# EAGLE board jr-support (EAGLE 8.1.0)
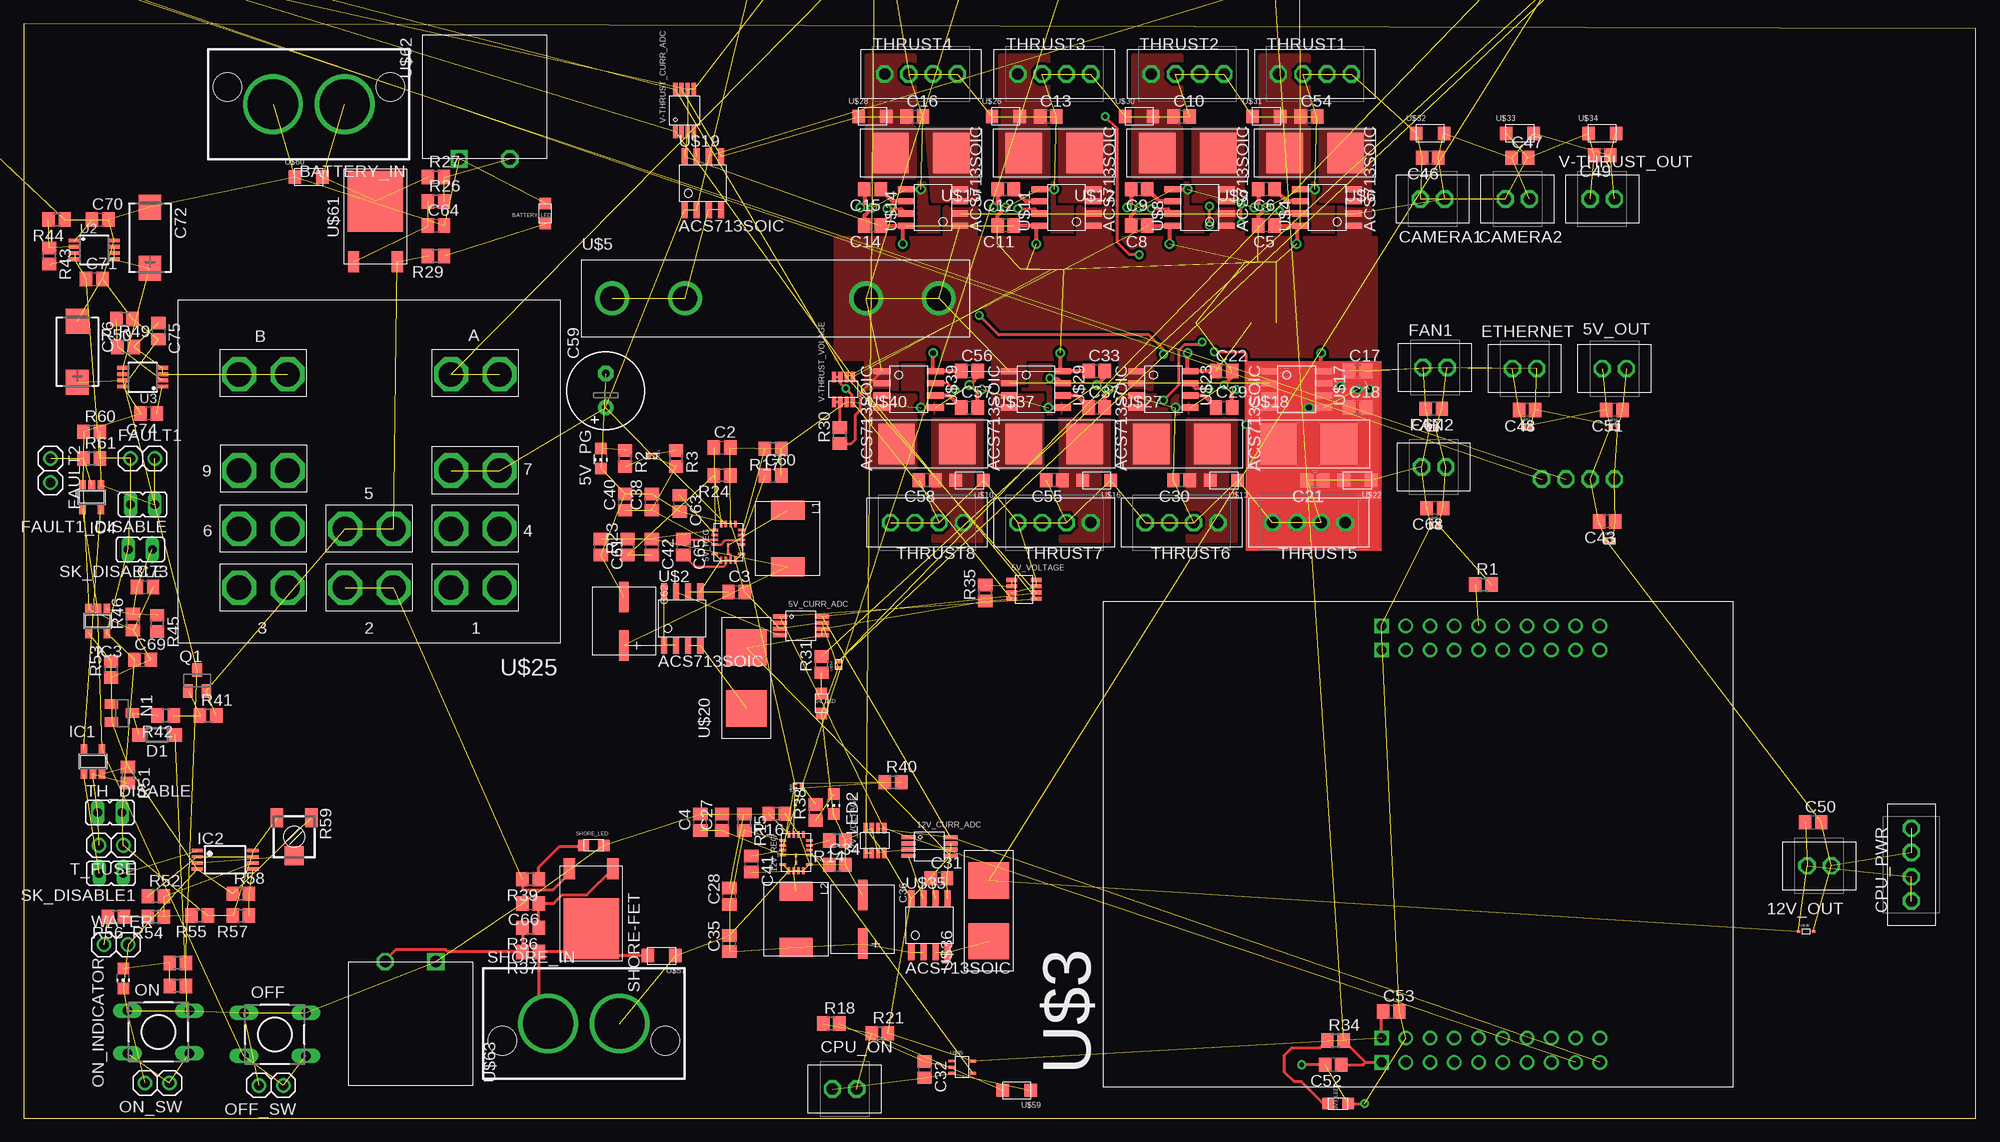
[diagram p0: board, top side]
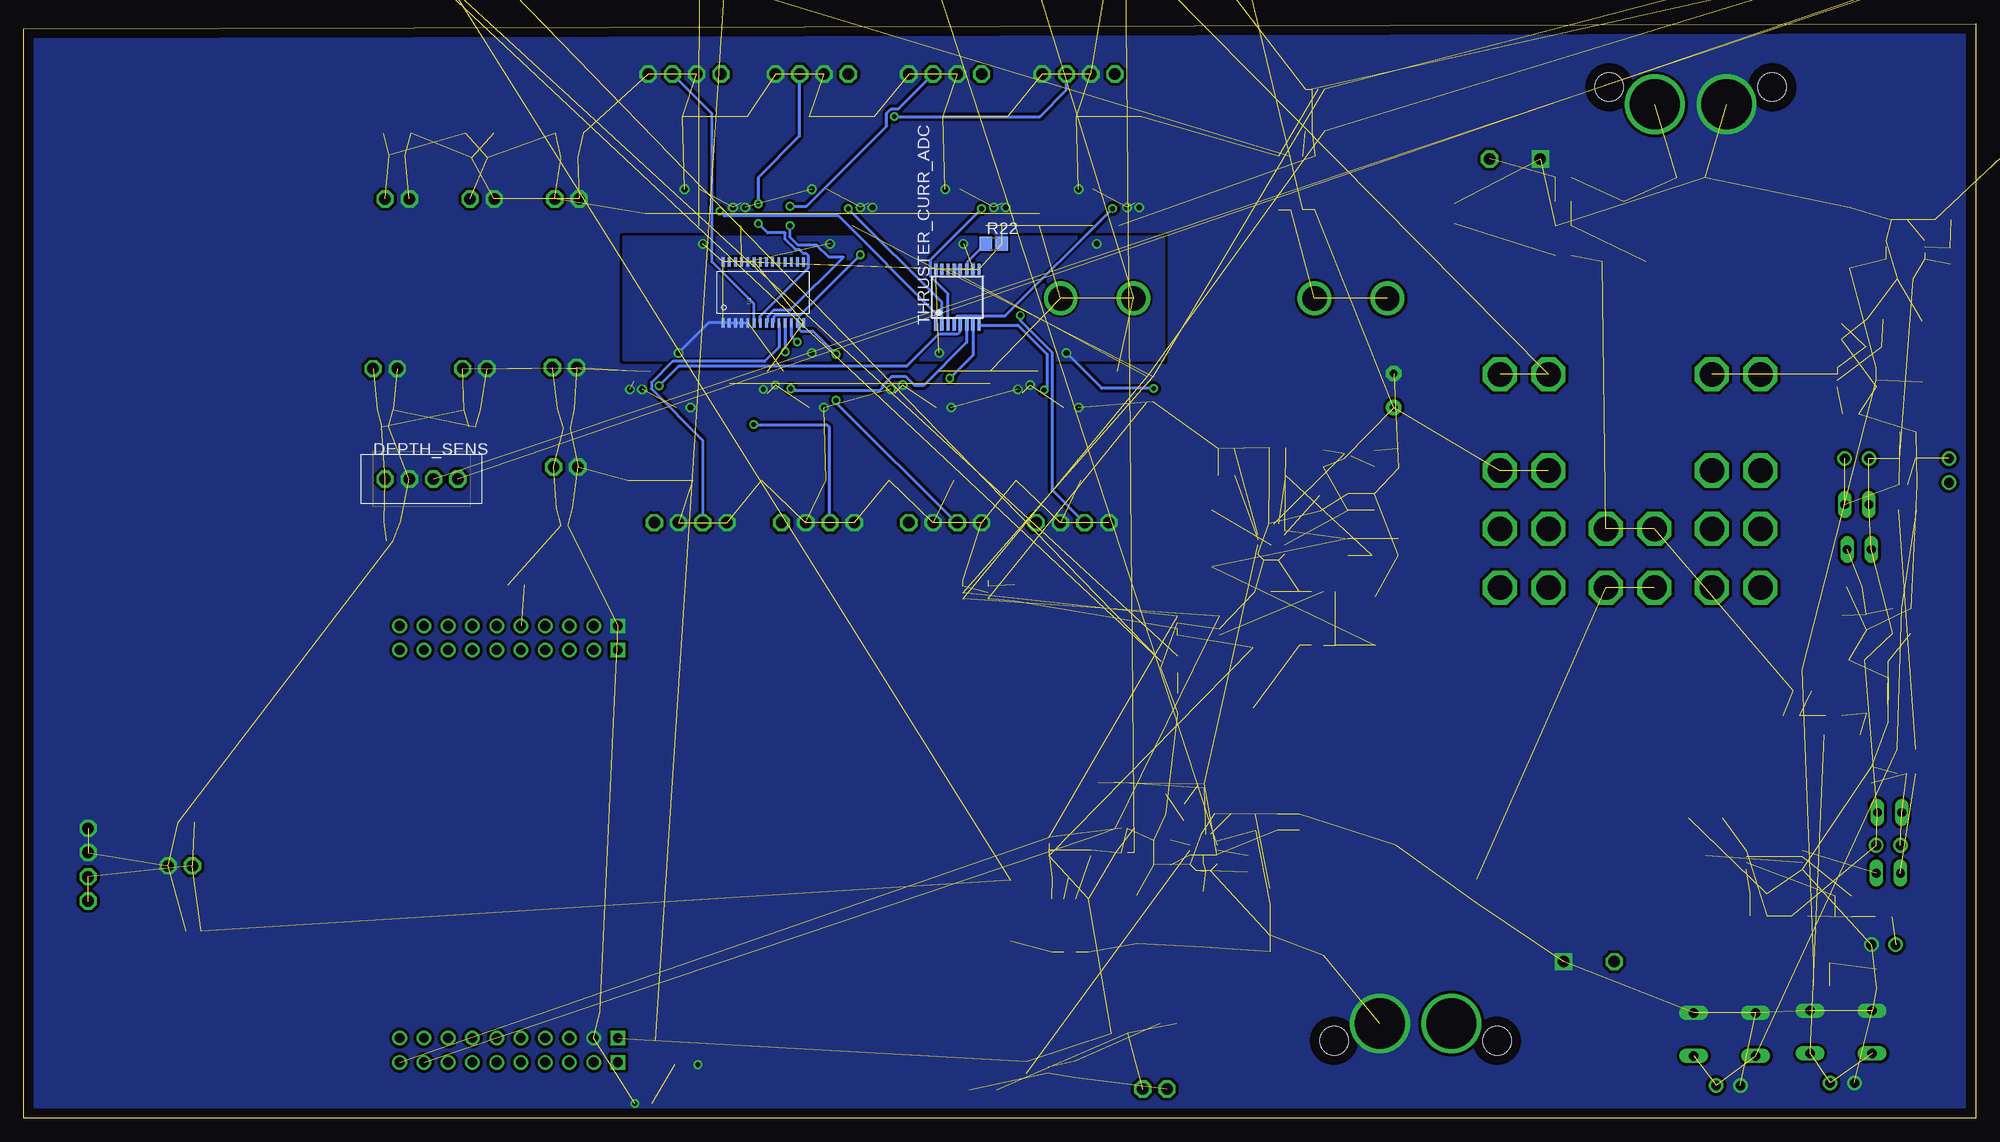
[diagram p1: board, bottom side, seen from below]

Size 204.47 x 114.6 mm. Coordinates in mm from the lower left corner, seen from the top.
Outline: 0,0 204.47,0 204.47,114.1 0,114.6 0,0
Copper layers (1*16): Top 0.035mm / dielectric 1.5mm / Bottom 0.035mm
Design rules "default": minimum track width 10mil, minimum drill 24mil, track to track 8mil, track to pad 8mil, pad to pad 8mil, via to via 8mil, smd to smd 8mil, copper to edge 40mil, drill to drill 8mil, minimum pad ring 10mil, minimum via ring 8mil, stop-mask expansion 4mil, vias tented up to drill 0mil, thermal gap 10mil
Holes 3.17 mm at 38.1,-10.67 45.72,-4.32 49.53,-10.67 43.94,-12.7

## Footprints (pad centres in the part's own frame; a part is rotated, then mirrored left to right if it is on the bottom)
0805 = smd 1.2 x 1.2: P$1 -1.05,0; P$2 1.05,0
VSSOP-8 = smd 0.45 x 1.45: P$1 -0.975,-2.2; P$2 -0.325,-2.2; P$3 0.325,-2.2; P$4 0.975,-2.2; P$5 0.975,2.2; P$6 0.325,2.2; P$7 -0.325,2.2; P$8 -0.975,2.2
KK254_VERT_2PIN = drill 1.2 octagon: P$1 1.27,0; P$2 -1.27,0
CHIP-LED0805 = smd 1.2 x 1.2: A 0,-1.05; C 0,1.05
QFN18-3X4 = smd 0.25 x 0.7: 1 1.25,1.4; 2 0.75,1.4; 3 0.25,1.4; 4 -0.25,1.4; 6 -1.25,1.4; 11 -1.25,-1.4; 13 -0.25,-1.4; 14 0.25,-1.4; 15 0.75,-1.4; 16 1.25,-1.4 | smd 0.7 x 0.25: 7 -1.9,0.75; 8 -1.9,0.25; 9 -1.9,-0.25; 10 -1.9,-0.75; 17 1.9,-0.75; 18 1.9,-0.25; 19 1.9,0.25; 20 1.9,0.75 | smd 0.4 x 0.22: 21 -1.075,0 | smd 0.356 x 0.22: 22 -0.305,0
SOT-23-8 = smd 0.45 x 1.1: P$1 -0.975,-1.3; P$2 -0.325,-1.3; P$3 0.325,-1.3; P$4 0.975,-1.3; P$5 0.975,1.3; P$6 0.325,1.3; P$7 -0.325,1.3; P$8 -0.975,1.3
SUPERSABRE_2CIRCUIT = drill 5.25: P$1 -3.747,0; P$2 3.747,0 | hole 2.997: -8.534,-1.803; 8.534,-1.803
BME280_LGA = smd 0.5 x 0.35: P$1 1.025,0.975; P$2 1.025,0.325; P$3 1.025,-0.325; P$4 1.025,-0.975; P$5 -1.025,-0.975; P$6 -1.025,-0.325; P$7 -1.025,0.325; P$8 -1.025,0.975
C0805 = smd 1.3 x 1.5: 1 -0.85,0; 2 0.85,0
C-F80 = smd 1 x 3.2: P$1 0,2.55; P$2 0,-2.53
E3,5-8 = drill 0.813 pad 1.6: + -1.778,0 | drill 0.813 pad 1.6 octagon: - 1.778,0
CT7343 = smd 2.6 x 2.4: + 3.2,0; - -3.2,0
KK254_VERT_4PIN = drill 1.2 octagon: P$1 3.81,0; P$2 1.27,0; P$3 -1.27,0; P$4 -3.81,0
SOD123 = smd 1.4 x 1.4: A 1.9,0; C -1.9,0
1X02 = drill 1.016: 1 -1.27,0; 2 1.27,0
JP1 = drill 0.914 long: 1 0,-1.27; 2 0,1.27
SM8 = smd 0.3 x 1.6: P$1 -0.975,-1.7; P$2 -0.34,-1.7; P$3 0.295,-1.7; P$4 0.93,-1.7; P$5 0.93,1.7; P$6 0.295,1.7; P$7 -0.34,1.7; P$8 -0.975,1.7
SOT23-5 = smd 0.69 x 0.99: 1 -0.95,-1.29; 2 0,-1.29; 3 0.95,-1.29; 4 0.95,1.3; 5 -0.95,1.3
TSSOP8 = smd 1.2 x 0.35: 1 -2.925,0.975; 2 -2.925,0.325; 3 -2.925,-0.325; 4 -2.925,-0.975; 5 2.925,-0.975; 6 2.925,-0.325; 7 2.925,0.325; 8 2.925,0.975
L0740 = smd 2 x 3.5: P$1 -2.95,0; P$2 2.95,0
SOT23 = smd 1 x 1.4: 1 -0.95,-1.1; 2 0.95,-1.1; 3 0,1.1
DTS-6 = drill 1 long: 1 -3.25,2.25; 2 3.25,2.25; 3 -3.25,-2.25; 4 3.25,-2.25
R0805 = smd 1.3 x 1.5: 1 -0.85,0; 2 0.85,0
RTRIM3314J = smd 1.3 x 2: 1 -1.8,-2; 3 1.8,-2 | smd 2 x 2: 2 0,2
TO252-3 = smd 1.2 x 2.2: 1 -2.28,-6.3; 3 2.28,-6.3 | smd 5.8 x 6.4: TAB 0,0
TSSOP16 = smd 0.35 x 1.2: 1 -2.275,-2.925; 2 -1.625,-2.925; 3 -0.975,-2.925; 4 -0.325,-2.925; 5 0.325,-2.925; 6 0.975,-2.925; 7 1.625,-2.925; 8 2.275,-2.925; 9 2.275,2.925; 10 1.625,2.925; 11 0.975,2.925; 12 0.325,2.925; 13 -0.325,2.925; 14 -0.975,2.925; 15 -1.625,2.925; 16 -2.275,2.925
TSSOP-28_4MM = smd 1 x 0.3: 1 -3.2,4.225; 2 -3.2,3.575; 3 -3.2,2.925; 4 -3.2,2.275; 5 -3.2,1.625; 6 -3.2,0.975; 7 -3.2,0.325; 8 -3.2,-0.325; 9 -3.2,-0.975; 10 -3.2,-1.625; 11 -3.2,-2.275; 12 -3.2,-2.925; 13 -3.2,-3.575; 14 -3.2,-4.225; 15 3.2,-4.225; 16 3.2,-3.575; 17 3.2,-2.925; 18 3.2,-2.275; 19 3.2,-1.625; 20 3.2,-0.975; 21 3.2,-0.325; 22 3.2,0.325; 23 3.2,0.975; 24 3.2,1.625; 25 3.2,2.275; 26 3.2,2.925; 27 3.2,3.575; 28 3.2,4.225
MSOP8 = smd 0.4 x 1.2: 1 -0.975,-2.05; 2 -0.325,-2.05; 3 0.325,-2.05; 4 0.975,-2.05; 5 0.975,2.05; 6 0.325,2.05; 7 -0.325,2.05; 8 -0.975,2.05
AP02002 = smd 0.4 x 0.25: P$1 -0.35,0.225; P$2 -0.35,-0.225 | smd 0.4 x 0.7: P$3 0.35,0
ACS713-SOIC = smd 0.65 x 1.75: P$1 -1.905,-2.8; P$2 -0.635,-2.8; P$3 0.635,-2.8; P$4 1.905,-2.8; P$5 1.905,2.8; P$6 0.635,2.8; P$7 -0.635,2.8; P$8 -1.905,2.8
TIVA-C_EVAL = drill 1.016 square: 1-1 -22.86,3.81; 2-1 22.86,3.81; 3-1 -20.32,3.81; 4-1 20.32,3.81 | drill 1.016: 1-2 -22.86,1.27; 1-3 -22.86,-1.27; 1-4 -22.86,-3.81; 1-5 -22.86,-6.35; 1-6 -22.86,-8.89; 1-7 -22.86,-11.43; 1-8 -22.86,-13.97; 1-9 -22.86,-16.51; 1-10 -22.86,-19.05; 2-2 22.86,1.27; 2-3 22.86,-1.27; 2-4 22.86,-3.81; 2-5 22.86,-6.35; 2-6 22.86,-8.89; 2-7 22.86,-11.43; 2-8 22.86,-13.97; 2-9 22.86,-16.51; 2-10 22.86,-19.05; 3-2 -20.32,1.27; 3-3 -20.32,-1.27; 3-4 -20.32,-3.81; 3-5 -20.32,-6.35; 3-6 -20.32,-8.89; 3-7 -20.32,-11.43; 3-8 -20.32,-13.97; 3-9 -20.32,-16.51; 3-10 -20.32,-19.05; 4-2 20.32,1.27; 4-3 20.32,-1.27; 4-4 20.32,-3.81; 4-5 20.32,-6.35; 4-6 20.32,-8.89; 4-7 20.32,-11.43; 4-8 20.32,-13.97; 4-9 20.32,-16.51; 4-10 20.32,-19.05
1.25"_FUSECLIPS = drill 2.54: P$1 -17.107,0; P$2 -9.487,0; P$3 9.487,0; P$4 17.107,0
154-OMNI-BLOK = smd 3.81 x 4.242: P$1 -3.188,0; P$2 3.188,0
DO-219AB = smd 1.3 x 1.4: P$1 -1.45,0; P$2 1.45,0
KUHP_6.35MM-QUICK-CONNECT = drill 2.57 octagon: 1A -13.64,6.17; 1B -8.56,6.17; 2A -2.54,6.17; 2B 2.54,6.17; 3A 8.56,6.17; 3B 13.64,6.17; 4A -13.64,0; 4B -8.56,0; 5A -2.54,0; 5B 2.54,0; 6A 8.56,0; 6B 13.64,0; 7A -13.64,-6.1; 7B -8.56,-6.1; 9A 8.56,-6.1; 9B 13.64,-6.1; AA -13.64,-16.18; AB -8.56,-16.18; BA 8.56,-16.18; BB 13.64,-16.18
TSSOP5 = smd 0.3 x 0.6: P$1 -0.65,-1.125; P$2 0,-1.125; P$3 0.65,-1.125; P$4 0.65,1.125; P$5 -0.62,1.125
SOD-923_SMD = smd 0.36 x 0.25: P$1 -0.78,0; P$2 0.78,0
X1-DFN1006-2 = smd 0.4 x 0.7: P$1 -0.35,0; P$2 0.35,0
GPTS203211B = drill 1.2 square: P$1 0,-2.65 | drill 1.2 octagon: P$2 0,2.65

## Placement (x,y rotation side)
3V3_LED  [0805]  137.67,1.52 0 top
5V_CURR_ADC  ADC121C021  [VSSOP-8]  81.41,51.56 270 top
5V_LED  [0805]  83.57,43.43 270 top
5V_OUT  5V_OUT  [KK254_VERT_2PIN]  166.62,78.49 0 top
5V_PG  [CHIP-LED0805]  60.45,69.09 180 top
5V_REG  LT8640  [QFN18-3X4]  73.79,60.32 90 top
5V_VOLTAGE  INA219SOT23  [SOT-23-8]  104.77,55.37 270 top
12V_CURR_ADC  ADC121C021  [VSSOP-8]  94.87,28.45 270 top
12V_LED  [0805]  not placed on the board
12V_OUT  12V_OUT  [KK254_VERT_2PIN]  188.09,26.42 180 top
12V_REG  LT8640  [QFN18-3X4]  80.9,27.81 90 top
12V_VOLTAGE  INA219SOT23  [SOT-23-8]  89.15,29.08 0 top
BATTERY_IN  2_SUPERSABRE  [SUPERSABRE_2CIRCUIT]  29.84,106.17 180 top
BATTERY_LED  [0805]  54.61,94.74 90 top
BME280  BME280  [BME280_LGA]  not placed on the board
C1  0.1u  [C0805]  not placed on the board
C2  0.1u  [C0805]  73.15,70.23 0 top
C3  47n  [C0805]  74.68,55.12 0 top
C4  1u  [C0805]  70.87,30.99 90 top
C5  0.1u  [C0805]  130.18,93.47 180 top
C6  47n  [C0805]  130.18,97.28 180 top
C7  [C0805]  not placed on the board
C8  0.1u  [C0805]  116.84,93.47 180 top
C9  47n  [C0805]  116.84,97.28 180 top
C10  [C0805]  121.28,104.9 0 top
C11  0.1u  [C0805]  102.87,93.47 180 top
C12  47n  [C0805]  102.87,97.28 180 top
C13  [C0805]  107.31,104.9 0 top
C14  0.1u  [C0805]  88.9,93.47 180 top
C15  47n  [C0805]  88.9,97.28 180 top
C16  [C0805]  93.34,104.9 0 top
C17  0.1u  [C0805]  139.7,78.23 0 top
C18  47n  [C0805]  139.7,74.42 0 top
C19  0.1u  [C0805]  not placed on the board
C20  47n  [C0805]  not placed on the board
C21  [C0805]  135.25,66.8 180 top
C22  0.1u  [C0805]  125.73,78.23 0 top
C23  100p  [C0805]  not placed on the board
C24  100n  [C0805]  not placed on the board
C25  100n  [C0805]  not placed on the board
C26  100n  [C0805]  not placed on the board
C27  10u  [C0805]  73.15,30.99 90 top
C28  15p  [C0805]  73.91,23.24 90 top
C29  47n  [C0805]  125.73,74.42 0 top
C30  [C0805]  121.28,66.8 180 top
C31  47n  [C0805]  95.86,25.11 0 top
C32  1u  [C0805]  94.36,5.08 270 top
C33  0.1u  [C0805]  112.39,78.23 0 top
C34  1u  [C0805]  85.22,26.54 0 top
C35  22u  [C0805]  73.91,18.29 90 top
C36  220u  [C-F80]  87.88,20.83 180 top
C37  47n  [C0805]  112.39,74.42 0 top
C38  1u  [C0805]  65.79,64.52 90 top
C39  1u  [C0805]  not placed on the board
C40  10u  [C0805]  62.99,64.52 90 top
C41  0.1u  [C0805]  76.22,26.62 270 top
C42  15p  [C0805]  65.79,59.82 270 top
C43  [C0805]  165.86,62.48 180 top
C44  [C0805]  not placed on the board
C45  [C0805]  not placed on the board
C46  [C0805]  147.32,100.58 180 top
C47  [C0805]  156.72,100.58 0 top
C48  [C0805]  157.48,74.17 180 top
C49  [C0805]  165.35,100.84 180 top
C50  [C0805]  187.45,30.99 0 top
C51  [C0805]  166.62,74.17 180 top
C52  [C0805]  137.16,5.59 180 top
C53  [C0805]  143.26,11.18 0 top
C54  [C0805]  134.62,104.9 0 top
C55  [C0805]  107.95,66.8 180 top
C56  0.1u  [C0805]  99.06,78.23 0 top
C57  47n  [C0805]  99.06,74.42 0 top
C58  [C0805]  94.61,66.8 180 top
C59  100u  [E3,5-8]  60.96,76.2 90 top
C60  1u  [C0805]  78.49,67.31 0 top
C61  22u  [C0805]  60.45,59.82 270 top
C62  220u  [C-F80]  62.87,52.07 180 top
C63  1u  [C0805]  68.71,64.39 270 top
C64  2.2u  [C0805]  43.18,93.47 0 top
C65  0.1u  [C0805]  69.09,59.82 270 top
C66  2.2u  [C0805]  53.09,22.48 180 top
C67  [C0805]  147.7,74.3 180 top
C68  [C0805]  147.83,63.88 180 top
C69  100nF  [C0805]  12.45,48.01 0 top
C70  10nF  [C0805]  8,94.11 0 top
C71  100nF  [C0805]  7.37,87.88 0 top
C72  T491D475K050AT  [CT7343]  13.21,92.2 270 top
C73  100nF  [C0805]  12.7,55.63 0 top
C74  10nF  [C0805]  13.08,73.79 180 top
C75  100nF  [C0805]  14.1,82.42 270 top
C76  T491D475K050AT  [CT7343]  5.59,80.26 270 top
CAMERA1  KK254_VERT_2PIN22-29-2021  [KK254_VERT_2PIN]  147.57,96.27 0 top
CAMERA2  KK254_VERT_2PIN22-29-2021  [KK254_VERT_2PIN]  156.46,96.27 0 top
CPU_ON  KK254_VERT_2PIN22-29-2021  [KK254_VERT_2PIN]  85.98,3.05 0 top
CPU_PWR  CPU PWR  [KK254_VERT_4PIN]  197.74,26.54 90 top
D1  MMSD4148  [SOD123]  13.97,40.13 180 top
DEPTH_SENS  Depth Sensor  [KK254_VERT_4PIN]  162.81,66.93 0 bottom
ETHERNET  KK254_VERT_2PIN22-29-2021  [KK254_VERT_2PIN]  157.23,78.49 0 top
FAN1  KK254_VERT_2PIN22-29-2021  [KK254_VERT_2PIN]  147.83,78.61 0 top
FAN2  Ethernet switch pwr  [KK254_VERT_2PIN]  147.7,68.2 0 top
FAULT1  [1X02]  12.45,69.09 0 top
FAULT1_DISABLE  [JP1]  12.45,64.26 90 top
FAULT2  [1X02]  2.79,67.82 270 top
I2C_SHIFT  [SM8]  not placed on the board
IC1  74LVC1G08DBV  [SOT23-5]  7.24,37.34 0 top
IC2  TLC2272PW  [TSSOP8]  21.08,27.05 0 top
IC3  74LVC1G08DBV  [SOT23-5]  7.75,52.07 180 top
IC4  74LVC1G08DBV  [SOT23-5]  7.11,65.02 180 top
L1  2.2u  [L0740]  80.01,60.71 270 top
L2  2.2u  [L0740]  80.9,20.83 270 top
LED2  FASTCHG  [CHIP-LED0805]  84.84,32.89 180 top
N1  2N7002  [SOT23]  10.29,42.42 270 top
OFF  DTS-6  [DTS-6]  26.29,8.76 0 top
OFF_SW  [1X02]  25.91,3.43 180 top
ON  DTS-6  [DTS-6]  14.1,9.02 0 top
ON_INDICATOR  Green  [CHIP-LED0805]  10.41,14.6 180 top
ON_SW  [1X02]  13.97,3.68 180 top
Q1  FDN5618P  [SOT23]  18.16,45.85 0 top
R1  10k  [R0805]  152.91,55.88 0 top
R2  1.2k  [R0805]  62.99,69.09 270 top
R3  50k  [R0805]  68.33,69.09 270 top
R7  4.7k  [R0805]  not placed on the board
R8  4.7k  [R0805]  not placed on the board
R10  4.2k  [R0805]  not placed on the board
R11  4.2k  [R0805]  not placed on the board
R12  200k  [R0805]  not placed on the board
R14  41.2k  [R0805]  85.22,29.08 180 top
R15  1M  [R0805]  75.47,30.99 270 top
R16  88.7k  [R0805]  78.87,31.88 180 top
R17  41.2k  [R0805]  78.49,70.1 180 top
R18  510  [R0805]  84.58,9.91 0 top
R19  10k  [R0805]  not placed on the board
R20  1.5k  [R0805]  not placed on the board
R21  6.8k  [R0805]  89.66,8.89 0 top
R22  0  [R0805]  102.87,91.57 0 bottom
R23  1M  [R0805]  63.25,59.82 90 top
R24  243k  [R0805]  73.15,67.31 180 top
R25  10  [R0805]  not placed on the board
R26  43k  [R0805]  43.18,96.01 0 top
R27  4.3k  [R0805]  43.18,98.55 0 top
R29  1.5k  [R0805]  43.18,90.3 180 top
R30  10  [R0805]  85.47,71.5 90 top
R31  270  [R0805]  83.57,47.5 90 top
R32  1.5k  [R0805]  not placed on the board
R33  1.2k  [R0805]  not placed on the board
R34  68  [R0805]  137.41,8.13 0 top
R35  10  [R0805]  100.71,54.99 90 top
R36  43k  [R0805]  53.09,19.94 180 top
R37  4.3k  [R0805]  53.09,17.4 180 top
R38  1.2k  [R0805]  82.93,32 90 top
R39  1.5k  [R0805]  53.09,25.02 180 top
R40  50k  [R0805]  91.06,35.18 0 top
R41  10k  [R0805]  19.3,42.16 0 top
R42  10k  [R0805]  14.86,42.16 180 top
R43  845k  [R0805]  2.67,90.3 270 top
R44  115k  [R0805]  3.43,94.11 180 top
R45  10k  [R0805]  13.97,51.82 270 top
R46  1M  [R0805]  11.43,51.94 90 top
R47  3.3k  [R0805]  16.13,13.84 0 top
R48  3.3k  [R0805]  16.13,16.26 0 top
R49  1M  [R0805]  10.67,80.77 0 top
R50  115k  [R0805]  10.54,83.69 180 top
R51  1M  [R0805]  10.92,35.94 270 top
R52  100k  [R0805]  13.84,23.24 0 top
R53  10k  [R0805]  9.14,46.99 90 top
R54  10k  [R0805]  13.84,21.08 180 top
R55  100k  [R0805]  18.41,21.21 180 top
R56  470  [R0805]  9.65,21.08 180 top
R57  100k  [R0805]  22.73,21.21 180 top
R58  100k  [R0805]  22.73,23.49 0 top
R59  [RTRIM3314J]  28.32,29.46 180 top
R60  1M  [R0805]  7.11,71.88 0 top
R61  50k  [R0805]  7.11,69.09 0 top
RELAY-OUT_LED  [0805]  not placed on the board
SHORE-FET  IPD50P04P4-13  [TO252-3]  59.44,19.81 180 top
SHORE_IN  2_SUPERSABRE  [SUPERSABRE_2CIRCUIT]  58.67,9.91 0 top
SHORE_LED  [0805]  59.69,28.57 0 top
SK_DISABLE  [JP1]  12.19,59.56 90 top
SK_DISABLE1  [JP1]  9.14,25.65 90 top
T_FUSE  [1X02]  9.14,28.57 180 top
TH_DISABLE  [JP1]  9.02,32 270 top
THRUST1  KK254_VERT_4PIN22-29-2041  [KK254_VERT_4PIN]  135.25,109.35 0 top
THRUST2  KK254_VERT_4PIN22-29-2041  [KK254_VERT_4PIN]  121.92,109.35 0 top
THRUST3  KK254_VERT_4PIN22-29-2041  [KK254_VERT_4PIN]  107.95,109.35 0 top
THRUST4  KK254_VERT_4PIN22-29-2041  [KK254_VERT_4PIN]  93.98,109.35 0 top
THRUST5  KK254_VERT_4PIN22-29-2041  [KK254_VERT_4PIN]  134.62,62.36 180 top
THRUST6  KK254_VERT_4PIN22-29-2041  [KK254_VERT_4PIN]  121.28,62.36 180 top
THRUST7  KK254_VERT_4PIN22-29-2041  [KK254_VERT_4PIN]  107.95,62.36 180 top
THRUST8  KK254_VERT_4PIN22-29-2041  [KK254_VERT_4PIN]  94.61,62.36 180 top
THRUSTER_CURR_ADC  ADS7828  [TSSOP16]  106.68,85.98 0 bottom
U1  PCA9685  [TSSOP-28_4MM]  127,86.49 90 bottom
U2  LT3063  [MSOP8]  7.37,90.93 270 top
U3  LT3063  [MSOP8]  12.45,77.6 90 top
U$1  DMP32D5SFB  [AP02002]  65.79,69.34 180 top
U$2  ACS713SOIC  [ACS713-SOIC]  68.96,52.32 0 top
U$3  TIVA-C_EVAL  [TIVA-C_EVAL]  146.05,28.7 90 top
U$4  ACS713SOIC  [ACS713-SOIC]  136.53,95.38 90 top
U$5  25A Fuse  [1.25"_FUSECLIPS]  78.74,85.85 0 top
U$6  4A Fuse  [154-OMNI-BLOK]  135.25,101.09 180 top
U$8  ACS713SOIC  [ACS713-SOIC]  123.19,95.38 90 top
U$9  4A Fuse  [154-OMNI-BLOK]  121.92,101.09 180 top
U$10  VTVS  [DO-219AB]  99.06,66.8 180 top
U$11  ACS713SOIC  [ACS713-SOIC]  109.22,95.38 90 top
U$12  4A Fuse  [154-OMNI-BLOK]  107.95,101.09 180 top
U$13  VTVS  [DO-219AB]  125.73,66.8 180 top
U$14  ACS713SOIC  [ACS713-SOIC]  95.25,95.38 90 top
U$15  4A Fuse  [154-OMNI-BLOK]  93.98,101.09 180 top
U$16  VTVS  [DO-219AB]  112.39,66.8 180 top
U$17  ACS713SOIC  [ACS713-SOIC]  133.35,76.33 270 top
U$18  4A Fuse  [154-OMNI-BLOK]  134.62,70.61 0 top
U$19  ACS713SOIC  [ACS713-SOIC]  71.12,97.92 0 top
U$20  4A Fuse  [154-OMNI-BLOK]  75.69,46.1 90 top
U$22  VTVS  [DO-219AB]  139.7,66.8 180 top
U$23  ACS713SOIC  [ACS713-SOIC]  119.38,76.33 270 top
U$25  KUHP-5XX1-XX  [KUHP_6.35MM-QUICK-CONNECT]  36.2,61.72 180 top
U$26  VTVS  [DO-219AB]  102.87,104.9 0 top
U$27  4A Fuse  [154-OMNI-BLOK]  121.28,70.61 0 top
U$28  VTVS  [DO-219AB]  88.9,104.9 0 top
U$29  ACS713SOIC  [ACS713-SOIC]  106.05,76.33 270 top
U$30  VTVS  [DO-219AB]  116.84,104.9 0 top
U$31  VTVS  [DO-219AB]  130.18,104.9 0 top
U$32  VTVS  [DO-219AB]  147.32,103.12 0 top
U$33  VTVS  [DO-219AB]  156.72,103.12 0 top
U$34  VTVS  [DO-219AB]  165.35,103.12 0 top
U$35  ACS713SOIC  [ACS713-SOIC]  94.87,20.19 0 top
U$36  4A Fuse  [154-OMNI-BLOK]  101.09,21.72 90 top
U$37  4A Fuse  [154-OMNI-BLOK]  107.95,70.61 0 top
U$38  VTVS  [DO-219AB]  not placed on the board
U$39  ACS713SOIC  [ACS713-SOIC]  92.71,76.33 270 top
U$40  4A Fuse  [154-OMNI-BLOK]  94.61,70.61 0 top
U$45  74LVC1G14  [TSSOP5]  98.3,5.33 270 top
U$46  ESD9X3  [SOD-923_SMD]  not placed on the board
U$47  ESD9X3  [SOD-923_SMD]  not placed on the board
U$48  ESD9X3  [SOD-923_SMD]  186.69,19.56 0 top
U$49  ESD9X3  [SOD-923_SMD]  not placed on the board
U$50  VTVS  [DO-219AB]  not placed on the board
U$51  DESD  [X1-DFN1006-2]  157.48,72.39 0 top
U$52  DESD  [X1-DFN1006-2]  166.12,60.45 0 top
U$53  DESD  [X1-DFN1006-2]  166.62,72.39 0 top
U$54  DESD  [X1-DFN1006-2]  85.34,47.5 90 top
U$57  VTVS  [DO-219AB]  66.8,17.02 180 top
U$59  VTVS  [DO-219AB]  104.01,2.92 180 top
U$60  VTVS  [DO-219AB]  29.84,98.55 0 top
U$61  IPD50P04P4-13  [TO252-3]  36.83,96.01 0 top
U$62  GPTS203212B  [GPTS203211B]  48.26,100.46 270 top
U$63  GPTS203212B  [GPTS203211B]  40.51,16.38 90 top
U$64  DESD  [X1-DFN1006-2]  147.57,72.26 0 top
U$65  DESD  [X1-DFN1006-2]  147.83,62.1 0 top
U$66  DMP32D5SFB  [AP02002]  81.15,34.8 0 top
V-THRUST_CURR_ADC  ADC121C021  [VSSOP-8]  69.22,105.54 0 top
V-THRUST_LED  [0805]  not placed on the board
V-THRUST_OUT  Vin_OUT  [KK254_VERT_2PIN]  165.35,96.27 0 top
V-THRUST_VOLAGE  INA219SOT23  [SOT-23-8]  85.85,76.33 0 top
WATER  [1X02]  9.65,18.16 0 top

## Library data of the parts
3V3_LED 5V_LED 5V_PG 12V_LED BATTERY_LED LED2 ON_INDICATOR RELAY-OUT_LED SHORE_LED V-THRUST_LED = led
5V_CURR_ADC 5V_VOLTAGE 12V_CURR_ADC 12V_VOLTAGE I2C_SHIFT IC2 THRUSTER_CURR_ADC U$3 V-THRUST_CURR_ADC V-THRUST_VOLAGE = texas
5V_OUT 12V_OUT BATTERY_IN CAMERA1 CAMERA2 CPU_ON CPU_PWR DEPTH_SENS ETHERNET FAN1 FAN2 SHORE_IN THRUST1-THRUST8 V-THRUST_OUT = molex
5V_REG 12V_REG U2 U3 = linear
BME280 = BME280ComponentLibrary; PROD_ID: IC-13090
C1-C76 L1 L2 R1-R3 R7 R8 R10-R12 R14-R27 R29-R61 = resistor
D1 U$10 U$13 U$16 U$22 U$26 U$28 U$30-U$34 U$38 U$46-U$54 U$57 U$59 U$60 U$64 U$65 = diode
FAULT1 FAULT2 OFF_SW ON_SW T_FUSE WATER = pinhead
FAULT1_DISABLE SK_DISABLE SK_DISABLE1 TH_DISABLE = jumper
IC1 IC3 IC4 = 74xx-little-us
N1 Q1 U$1 U$66 = transistor-fet
OFF ON = switch-tact
SHORE-FET U$61 = transistor-power
U1 = NXP; PROD_ID: IC-12240
U$2 U$4 U$8 U$11 U$14 U$17 U$19 U$23 U$29 U$35 U$39 = allegro
U$5 U$6 U$9 U$12 U$15 U$18 U$20 U$27 U$36 U$37 U$40 = littelfuse
U$25 = TE
U$45 = NXP
U$62 U$63 = switches

## Nets
3V3: BME280.P$2 BME280.P$5 BME280.P$6 BME280.P$8 C24.1 C25.1 C26.1 C52.1 I2C_SHIFT.P$2 R10.2 R11.2 R34.2 U$3.1-1
5V: 5V_CURR_ADC.P$5 5V_CURR_ADC.P$6 5V_OUT.P$1 5V_VOLTAGE.P$4 12V_CURR_ADC.P$5 12V_VOLTAGE.P$4 12V_VOLTAGE.P$8 C1.1 C5.1 C7.1 C8.1 C11.1 C14.1 C17.1 C19.1 C22.1 C33.1 C43.1 C48.1 C51.1 C53.1 C56.1 C67.1 C68.1 DEPTH_SENS.P$4 ETHERNET.P$1 FAN1.P$1 FAN2.P$1 R1.2 R7.2 R8.2 R12.2 R21.2 R31.2 R35.1 THRUSTER_CURR_ADC.10 THRUSTER_CURR_ADC.16 U1.1 U1.2 U1.3 U1.4 U1.5 U1.24 U1.28 U$3.3-1 U$4.P$8 U$8.P$8 U$11.P$8 U$14.P$8 U$17.P$8 U$19.P$8 U$20.P$2 U$23.P$8 U$29.P$8 U$35.P$8 U$39.P$8 U$45.P$5 U$51.P$2 U$52.P$2 U$53.P$2 U$54.P$2 U$64.P$2 U$65.P$2 V-THRUST_CURR_ADC.P$3 V-THRUST_CURR_ADC.P$5 V-THRUST_CURR_ADC.P$6 V-THRUST_VOLAGE.P$4 V-THRUST_VOLAGE.P$7 V-THRUST_VOLAGE.P$8
5V_PG: FAULT2.2
12V: 12V_OUT.P$1 C44.1 C45.1 C50.1 CPU_PWR.P$3 CPU_PWR.P$4 R25.1 R33.2 U$36.P$2 U$46.P$1 U$47.P$1 U$48.P$1 U$49.P$1
+5V: C69.1 C71.1 FAULT1.1 FAULT1_DISABLE.2 IC2.8 IC3.5 R43.2 R55.1 R57.2 R59.3 R61.2 SK_DISABLE.2 T_FUSE.1 TH_DISABLE.2 U2.3 U2.4
AIN0: U$3.3-9
AIN1: U$3.3-8
AIN2: U$3.3-7
AIN3: U$3.2-3
AIN4: U$3.3-6
AIN5: U$3.3-5
AIN8: U$3.1-6
AIN9: U$3.1-5
AIN10: U$3.1-7
AIN11: U$3.1-2
CPU_ON: 12V_REG.14 U$45.P$4
FAULT: IC1.4 IC3.2 IC4.4 OFF.3 OFF.4 OFF_SW.1
FET: IC3.4 N1.1 R53.2
GND: 3V3_LED.P$2 5V_CURR_ADC.P$3 5V_CURR_ADC.P$7 5V_LED.P$2 5V_OUT.P$2 5V_PG.C 5V_REG.6 5V_REG.7 5V_REG.10 5V_REG.11 5V_REG.18 5V_VOLTAGE.P$3 5V_VOLTAGE.P$7 5V_VOLTAGE.P$8 12V_CURR_ADC.P$3 12V_CURR_ADC.P$6 12V_CURR_ADC.P$7 12V_LED.P$2 12V_OUT.P$2 12V_REG.6 12V_REG.7 12V_REG.10 12V_REG.11 12V_REG.18 12V_VOLTAGE.P$3 12V_VOLTAGE.P$7 BATTERY_IN.P$2 BATTERY_LED.P$2 BME280.P$1 BME280.P$7 C1.2 C2.2 C3.2 C4.2 C5.2 C6.2 C7.2 C8.2 C9.2 C10.2 C11.2 C12.2 C13.2 C14.2 C15.2 C16.2 C17.2 C18.2 C19.2 C20.2 C21.2 C22.2 C23.2 C24.2 C25.2 C26.2 C27.2 C29.2 C30.2 C31.2 C33.2 C34.2 C35.2 C36.P$2 C37.2 C38.2 C39.2 C40.2 C43.2 C44.2 C45.2 C46.2 C47.2 C48.2 C49.2 C50.2 C51.2 C52.2 C53.2 C54.2 C55.2 C56.2 C57.2 C58.2 C59.- C60.2 C61.2 C62.P$2 C63.2 C64.2 C66.2 C67.2 C68.2 C69.2 C70.2 C71.2 C72.- C73.2 C74.2 C75.2 C76.- CAMERA1.P$2 CAMERA2.P$2 CPU_PWR.P$1 CPU_PWR.P$2 DEPTH_SENS.P$3 ETHERNET.P$2 FAN1.P$2 FAN2.P$2 I2C_SHIFT.P$1 IC1.3 IC2.4 IC3.3 IC4.3 LED2.C N1.2 OFF.1 OFF.2 OFF_SW.2 ON.1 ON.2 ON_INDICATOR.C ON_SW.2 R14.1 R16.1 R17.1 R19.2 R22.2 R24.1 R44.1 R46.1 R50.1 R51.1 R53.1 R58.1 R59.1 R60.1 RELAY-OUT_LED.P$2 SHORE_IN.P$2 SHORE_LED.P$2 THRUST1.P$1 THRUST1.P$3 THRUST2.P$1 THRUST2.P$3 THRUST3.P$1 THRUST3.P$3 THRUST4.P$1 THRUST4.P$3 THRUST5.P$1 THRUST5.P$3 THRUST6.P$1 THRUST6.P$3 THRUST7.P$1 THRUST7.P$3 THRUST8.P$1 THRUST8.P$3 THRUSTER_CURR_ADC.9 THRUSTER_CURR_ADC.12 THRUSTER_CURR_ADC.13 U1.14 U1.23 U1.25 U2.8 U3.8 U$2.P$5 U$3.2-1 U$3.3-2 U$4.P$5 U$8.P$5 U$10.P$1 U$11.P$5 U$13.P$1 U$14.P$5 U$16.P$1 U$17.P$5 U$19.P$5 U$22.P$1 U$23.P$5 U$26.P$1 U$28.P$1 U$29.P$5 U$30.P$1 U$31.P$1 U$32.P$1 U$33.P$1 U$34.P$1 U$35.P$5 U$38.P$1 U$39.P$5 U$46.P$2 U$47.P$2 U$48.P$2 U$49.P$2 U$50.P$1 U$51.P$1 U$52.P$1 U$53.P$1 U$54.P$1 U$57.P$1 U$60.P$1 U$62.P$1 U$63.P$1 U$64.P$1 U$65.P$1 V-THRUST_CURR_ADC.P$7 V-THRUST_LED.P$2 V-THRUST_OUT.P$2 V-THRUST_VOLAGE.P$3 WATER.2
N$1: 12V_REG.15 R14.2
N$2: R1.1 U$3.2-5
N$3: FAULT2.1 IC4.2 R61.1
N$4: 5V_PG.A R2.1
N$5: R2.2 U$1.P$3
N$6: 5V_REG.19 R3.1 U$1.P$2
N$7: 12V_REG.1 C28.1 C35.1 C36.P$1 L2.P$2 R15.2 U$35.P$1 U$35.P$2
N$8: 5V_REG.15 R17.2
N$11: C3.1 U$2.P$6
N$12: C9.1 U$8.P$6
N$13: C6.1 U$4.P$6
N$14: C54.1 THRUST1.P$4 U$6.P$2 U$31.P$2
N$15: U$4.P$3 U$4.P$4 U$6.P$1
N$16: C10.1 THRUST2.P$4 U$9.P$2 U$30.P$2
N$17: U$8.P$3 U$8.P$4 U$9.P$1
N$18: C12.1 U$11.P$6
N$19: C13.1 THRUST3.P$4 U$12.P$2 U$26.P$2
N$20: U$11.P$3 U$11.P$4 U$12.P$1
N$21: C15.1 U$14.P$6
N$22: C16.1 THRUST4.P$4 U$15.P$2 U$28.P$2
N$23: R22.1 THRUSTER_CURR_ADC.11
N$24: U$14.P$3 U$14.P$4 U$15.P$1
N$25: C18.1 U$17.P$6
N$26: C21.1 THRUST5.P$4 U$18.P$2 U$22.P$2
N$27: U$17.P$3 U$17.P$4 U$18.P$1
N$28: C29.1 U$23.P$6
N$29: C30.1 THRUST6.P$4 U$13.P$2 U$27.P$2
N$30: U$23.P$3 U$23.P$4 U$27.P$1
N$31: C37.1 U$29.P$6
N$32: 12V_REG.8 12V_REG.9 12V_REG.21 12V_REG.22 C41.2 L2.P$1
N$33: C20.1 U$19.P$6
N$34: U$5.P$1 U$5.P$2 U$19.P$3 U$19.P$4
N$35: R19.1 U$25.AA U$25.AB
N$36: C55.1 THRUST7.P$4 U$16.P$2 U$37.P$2
N$37: U$29.P$3 U$29.P$4 U$37.P$1
N$38: C57.1 U$39.P$6
N$39: C58.1 THRUST8.P$4 U$10.P$2 U$40.P$2
N$40: 5V_REG.8 5V_REG.9 5V_REG.21 5V_REG.22 C65.2 L1.P$1
N$41: C23.1 I2C_SHIFT.P$7 I2C_SHIFT.P$8 R12.1
N$42: 5V_REG.20 C42.2 R23.1 R24.2
N$43: 5V_REG.3 C65.1
N$44: 12V_REG.20 C28.2 R15.1 R16.2
N$45: 12V_REG.3 C41.1
N$46: Q1.1 R41.1 R42.1
N$47: U$39.P$3 U$39.P$4 U$40.P$1
N$48: 5V_REG.2 C63.1
N$49: 12V_VOLTAGE.P$1 12V_VOLTAGE.P$2 R25.2
N$50: R37.1 SHORE-FET.TAB SHORE_IN.P$1 U$57.P$2
N$51: C32.2 CPU_ON.P$2 U$45.P$3 U$59.P$1
N$52: C31.1 U$35.P$6
N$53: U$19.P$7 V-THRUST_CURR_ADC.P$4
N$54: 12V_REG.2 C39.1
N$55: U$2.P$3 U$2.P$4 U$20.P$1
N$56: U$35.P$3 U$35.P$4 U$36.P$1
N$57: 5V_CURR_ADC.P$4 U$2.P$7
N$58: R30.2 V-THRUST_VOLAGE.P$1 V-THRUST_VOLAGE.P$2
N$59: C32.1 R18.2 U$45.P$2
N$60: 12V_CURR_ADC.P$4 U$35.P$7
N$61: CPU_ON.P$1 R18.1 R21.1 U$59.P$2
N$62: C66.1 R36.1 SHORE-FET.1
N$63: R36.2 R37.2 U$63.P$2
N$64: BATTERY_IN.P$1 R27.1 U$60.P$2 U$61.TAB
N$65: C64.1 R26.1 U$61.1
N$66: R26.2 R27.2 U$62.P$2
N$68: R20.1 RELAY-OUT_LED.P$1
N$69: BATTERY_LED.P$1 R29.1
N$71: 5V_LED.P$1 R31.1
N$72: R32.1 V-THRUST_LED.P$1
N$73: 12V_LED.P$1 R33.1
N$74: 3V3_LED.P$1 R34.1
N$75: R39.1 SHORE_LED.P$1
N$76: FAULT1.2 FAULT1_DISABLE.1 IC4.1 R60.2
N$77: 5V_VOLTAGE.P$1 5V_VOLTAGE.P$2 R35.2
N$78: LED2.A R38.1
N$79: R38.2 U$66.P$3
N$80: 12V_REG.19 R40.1 U$66.P$2
N$81: D1.A N1.3 R42.2
N$82: R43.1 R44.2 U2.2
N$83: C70.1 U2.1
N$84: ON_INDICATOR.A R47.1 R48.1
N$85: R49.1 R50.2 U3.2
N$86: C74.1 U3.1
N$87: IC1.2 R51.2 T_FUSE.2 TH_DISABLE.1
N$88: IC2.2 IC2.7 R52.1
N$89: IC2.6 R52.2 R54.1
N$90: IC2.5 R57.1 R58.2
N$91: R54.2 R55.2 R56.1
N$92: R56.2 WATER.1
N$93: IC2.3 R59.2
N$94: IC2.1 SK_DISABLE1.1
ON_SW: D1.C ON.3 ON.4 ON_SW.1
RELAY-BATT: Q1.2 R29.2 R41.2 U$25.5A U$25.5B U$61.3
RELAY-CTRL: C75.1 R49.2 U3.3 U3.4 U$25.BA U$25.BB
RELAY-SHORE: R39.2 SHORE-FET.3 U$25.2A U$25.2B
RELAY_OUT: 5V_REG.4 5V_REG.13 5V_REG.14 12V_REG.4 12V_REG.13 C4.1 C27.1 C34.1 C38.1 C40.1 C59.+ C60.1 R3.2 R20.2 R40.2 U$1.P$1 U$19.P$1 U$19.P$2 U$25.7A U$25.7B U$50.P$2 U$66.P$1
RX: U$3.1-3
SCL1: 5V_CURR_ADC.P$1 5V_VOLTAGE.P$5 12V_CURR_ADC.P$1 12V_VOLTAGE.P$5 I2C_SHIFT.P$6 R8.1 THRUSTER_CURR_ADC.14 U1.26 U$3.1-9 V-THRUST_CURR_ADC.P$1 V-THRUST_VOLAGE.P$5
SCL3: U$3.2-7
SCL-3V3: BME280.P$4 DEPTH_SENS.P$1 I2C_SHIFT.P$3 R11.1
SDA1: 5V_CURR_ADC.P$8 5V_VOLTAGE.P$6 12V_CURR_ADC.P$8 12V_VOLTAGE.P$6 I2C_SHIFT.P$5 R7.1 THRUSTER_CURR_ADC.15 U1.27 U$3.1-10 V-THRUST_CURR_ADC.P$8 V-THRUST_VOLAGE.P$6
SDA3: U$3.2-6
SDA-3V3: BME280.P$3 DEPTH_SENS.P$2 I2C_SHIFT.P$4 R10.1
SK: C73.1 IC3.1 R45.1 R46.2 SK_DISABLE.1
SOFT_KILL: R45.2
SW-5V: 5V_REG.1 C2.1 C42.1 C61.1 C62.P$1 L1.P$2 R23.2 U$2.P$1 U$2.P$2 U$2.P$8
T1_CURR: THRUSTER_CURR_ADC.1 U$4.P$7
T1_PWM: THRUST1.P$2 U1.6
T2_CURR: THRUSTER_CURR_ADC.2 U$8.P$7
T2_PWM: THRUST2.P$2 U1.7
T3_CURR: THRUSTER_CURR_ADC.3 U$11.P$7
T3_PWM: THRUST3.P$2 U1.8
T4_CURR: THRUSTER_CURR_ADC.4 U$14.P$7
T4_PWM: THRUST4.P$2 U1.9
T5_CURR: THRUSTER_CURR_ADC.5 U$17.P$7
T5_PWM: THRUST5.P$2 U1.10
T6_CURR: THRUSTER_CURR_ADC.6 U$23.P$7
T6_PWM: THRUST6.P$2 U1.11
T7_CURR: THRUSTER_CURR_ADC.7 U$29.P$7
T7_PWM: THRUST7.P$2 U1.12
T8_CURR: THRUSTER_CURR_ADC.8 U$39.P$7
T8_PWM: THRUST8.P$2 U1.13
TX: U$3.1-4
V_THRUST: C46.1 C47.1 C49.1 CAMERA1.P$1 CAMERA2.P$1 R30.1 R32.2 U$4.P$1 U$4.P$2 U$5.P$3 U$5.P$4 U$8.P$1 U$8.P$2 U$11.P$1 U$11.P$2 U$14.P$1 U$14.P$2 U$17.P$1 U$17.P$2 U$23.P$1 U$23.P$2 U$29.P$1 U$29.P$2 U$32.P$2 U$33.P$2 U$34.P$2 U$38.P$2 U$39.P$1 U$39.P$2 V-THRUST_OUT.P$1
VCC: IC1.5 IC4.5
VDD: C72.+ C76.+ Q1.3 R47.2 R48.2 U2.5 U2.6 U2.7 U3.5 U3.6 U3.7
WATER: IC1.1 SK_DISABLE1.2

## Tracks (layer width: path | path; a pad name or v marks a point on that pad's centre or on a via)
3V3  (10 unrouted)
  Top 0.305: 140.55,5.84 U$3.1-1 | 140.55,5.84 R34.2 | C52.1 140.3,5.59 140.55,5.84
5V  (via drill 0.5, 0.6)  (51 unrouted)
  Top 0.305: V-THRUST_VOLAGE.P$8 V-THRUST_VOLAGE.P$7 85.53,76.95 86.76,75.72 | 86.76,75.72 86.76,75.04 86.87,74.93 86.87,74.99 V-THRUST_VOLAGE.P$4 | 86.76,75.72 86.76,75.77 v86.11,76.42 | U$3.3-1 142.24,11.01 C53.1
  Top 0.406: C14.1 U$14.P$8 92.07,93.47 v92.07,91.57 | v106.05,91.57 106.05,93.47 U$11.P$8 C11.1 | C8.1 U$8.P$8 120.02,93.47 v120.02,91.57 | C5.1 U$4.P$8 133.35,93.47 v133.35,91.57 | C17.1 U$17.P$8 135.89,78.23 v135.89,80.14 | C22.1 U$23.P$8 121.92,78.23 v121.92,80.14 | C33.1 U$29.P$8 108.58,78.23 v108.58,80.14 | C56.1 U$39.P$8 95.25,78.23 v95.25,80.14
  Bottom 0.305: U1.5 U1.4 U1.3 U1.2 U1.1 132.74,83.29 v135.89,80.14 | v86.11,76.42 91.53,76.42 v95.25,80.14
  pour Bottom (no thermals): 85.09,92.2 141.6,92.2 141.6,79.5 85.09,79.5
12V  (12 unrouted)
+5V  (15 unrouted)
CPU_ON  (1 unrouted)
FAULT  (5 unrouted)
FET  (2 unrouted)
GND  (via drill 0.5, 0.6)  (207 unrouted)
  Top 0.305: C52.2 v133.86,5.59 | 3V3_LED.P$2 v140.46,1.52
  Top 0.406: U$14.P$5 v93.98,97.28 | U$11.P$5 v107.95,97.28 | U$8.P$5 v121.92,97.28 | U$4.P$5 v135.25,97.28 | U$17.P$5 v134.62,74.42 | U$23.P$5 v120.65,74.42 | U$29.P$5 v107.31,74.42 | U$39.P$5 v93.98,74.42 | C56.2 99.91,77.63 v99.06,76.78 | C57.2 99.91,75.91 v100.33,76.33 | C33.2 113.24,77.63 v112.39,76.78 | C37.2 113.24,75.91 v113.66,76.33 | C22.2 126.58,77.63 v125.73,76.78 | C29.2 126.58,75.91 v127,76.33 | C18.2 140.55,75.91 v140.97,76.33 | C17.2 140.55,77.18 v139.7,76.33 | C6.2 129.32,95.8 v128.91,95.38 | C5.2 129.32,94.53 v130.18,95.38 | C9.2 115.99,95.8 v115.57,95.38 | C8.2 115.99,94.53 v116.84,95.38 | C12.2 102.02,95.8 v101.6,95.38 | C11.2 102.02,94.53 v102.87,95.38 | C15.2 88.05,95.8 v87.63,95.38 | C14.2 88.05,94.53 v88.9,95.38
  Bottom 0.305: THRUSTER_CURR_ADC.12 THRUSTER_CURR_ADC.13
  Bottom 0.406: v99.06,76.78 99.06,76.96 | v112.39,76.78 112.39,76.96 | v125.73,76.78 125.73,76.96
  pour Bottom (isolate 0.305, rank 6, no thermals): -32.13,122.05 -32.13,-2.41 267.33,-1.14 267.33,123.32
  pour Top (isolate 0.305, rank 6): 93.34,97.92 97.16,97.92 97.16,92.2 93.34,92.2
  pour Top (isolate 0.305, rank 6): 107.31,97.92 111.12,97.92 111.12,92.2 107.31,92.2
  pour Top (isolate 0.305, rank 6): 121.28,97.92 125.09,97.92 125.09,92.2 121.28,92.2
  pour Top (isolate 0.305, rank 6): 134.62,97.92 138.43,97.92 138.43,92.2 134.62,92.2
  pour Top (isolate 0.305, rank 6): 132.08,78.87 135.89,78.87 135.89,73.15 132.08,73.15
  pour Top (isolate 0.305, rank 6): 118.11,79.5 121.92,79.5 121.92,73.79 118.11,73.79
  pour Top (isolate 0.305, rank 6): 104.77,79.5 108.58,79.5 108.58,73.79 104.77,73.79
  pour Top (isolate 0.305, rank 6): 91.44,79.5 95.25,79.5 95.25,73.79 91.44,73.79
N$1  (1 unrouted)
N$2  (1 unrouted)
N$3  (2 unrouted)
N$4  (1 unrouted)
N$5  (1 unrouted)
N$6  (2 unrouted)
N$7  (7 unrouted)
N$8  (1 unrouted)
N$11  (1 unrouted)
N$12
  Top 0.406: U$8.P$6 118.96,96.01 C9.1
N$13
  Top 0.406: U$4.P$6 132.3,96.01 C6.1
N$14
  pour Top (isolate 0.305, no thermals): 134.62,98.55 134.62,111.25 129.54,111.25 129.54,98.55
N$15
  pour Top (isolate 0.305, rank 2, no thermals): 140.97,96.01 135.89,96.01 135.89,103.63 140.97,103.63
N$16
  pour Top (isolate 0.305, no thermals): 121.28,98.55 121.28,111.25 116.2,111.25 116.2,98.55
N$17
  pour Top (isolate 0.305, rank 2, no thermals): 127.63,96.01 122.55,96.01 122.55,103.63 127.63,103.63
N$18
  Top 0.406: U$11.P$6 104.99,96.01 C12.1
N$19
  pour Top (isolate 0.305, no thermals): 107.31,98.55 107.31,111.25 102.23,111.25 102.23,98.55
N$20
  pour Top (isolate 0.305, rank 2, no thermals): 113.66,96.01 108.58,96.01 108.58,103.63 113.66,103.63
N$21
  Top 0.406: U$14.P$6 91.02,96.01 C15.1
N$22
  pour Top (isolate 0.305, no thermals): 93.34,98.55 93.34,111.25 88.27,111.25 88.27,98.55
N$23
  Bottom 0.305: R22.1 105.66,89.62 105.66,88.9 THRUSTER_CURR_ADC.11
N$24
  pour Top (isolate 0.305, rank 2, no thermals): 99.69,96.01 95.25,96.01 94.61,103.63 99.69,103.63
N$25
  Top 0.406: U$17.P$6 137.58,75.69 C18.1
N$26
  pour Top (isolate 0.305, no thermals): 140.34,60.45 140.34,73.15 135.25,73.15 135.25,60.45
N$27
  pour Top (isolate 0.305, rank 2, no thermals): 133.99,68.07 128.91,68.07 128.91,75.69 133.99,75.69
N$28
  Top 0.406: U$23.P$6 123.61,75.69 C29.1
N$29
  pour Top (isolate 0.305, no thermals): 127,60.45 127,73.15 121.92,73.15 121.92,60.45
N$30
  pour Top (isolate 0.305, rank 2, no thermals): 120.02,68.07 114.93,68.07 114.93,75.69 120.02,75.69
N$31
  Top 0.406: U$29.P$6 110.27,75.69 C37.1
N$32  (5 unrouted)
N$33  (1 unrouted)
N$34  (3 unrouted)
N$35  (2 unrouted)
N$36
  pour Top (isolate 0.305, no thermals): 113.66,60.45 113.66,73.15 108.58,73.15 108.58,60.45
N$37
  pour Top (isolate 0.305, rank 2, no thermals): 106.68,68.07 101.6,68.07 101.6,75.69 106.68,75.69
N$38
  Top 0.406: U$39.P$6 96.94,75.69 C57.1
N$39
  pour Top (isolate 0.305, no thermals): 100.33,60.45 100.33,73.15 95.25,73.15 95.25,60.45
N$40  (1 unrouted)
  Top 0.254: C65.2 70.31,57.74 73.3,57.74 73.49,57.94 73.49,58.38 5V_REG.8 5V_REG.9 74.04,59 5V_REG.21 5V_REG.22
N$41  (3 unrouted)
N$42  (3 unrouted)
N$43
  Top 0.254: 5V_REG.3 69.18,60.57
  Top 0.305: 69.18,60.57 C65.1
N$44  (3 unrouted)
N$45  (1 unrouted)
N$46  (2 unrouted)
N$47
  pour Top (isolate 0.305, rank 2, no thermals): 93.34,68.07 88.27,68.07 88.27,75.69 93.34,75.69
N$48  (1 unrouted)
N$49  (2 unrouted)
N$50
  Top 0.305: U$57.P$2 62.23,17.02 SHORE-FET.TAB 57.02,17.4 R37.1 53.94,10.9 SHORE_IN.P$1
N$51  (3 unrouted)
N$52  (1 unrouted)
N$53  (1 unrouted)
N$54  (1 unrouted)
N$55  (2 unrouted)
N$56  (2 unrouted)
N$57  (1 unrouted)
N$58
  Top 0.305: 85.47,74.97 R30.2 | 85.47,74.97 V-THRUST_VOLAGE.P$2 | V-THRUST_VOLAGE.P$1 85.5,75.03 85.6,74.93 85.51,74.93 85.47,74.97
N$59  (2 unrouted)
N$60  (1 unrouted)
N$61  (3 unrouted)
N$62
  Top 0.305: R36.1 C66.1 55.5,22.48 56.39,23.37 58.97,23.37 SHORE-FET.1
N$63
  Top 0.305: R36.2 R37.2 44.45,17.4 44.21,17.64 38.98,17.64 37.85,16.51 37.85,16.4 U$63.P$2 | R36.2 52.24,20.23 52.32,20.32 52.32,20.03 R36.2
N$64  (3 unrouted)
N$65  (2 unrouted)
N$66  (2 unrouted)
N$68  (1 unrouted)
N$69  (1 unrouted)
N$71  (1 unrouted)
N$72  (1 unrouted)
N$73  (1 unrouted)
N$74
  Top 0.305: 3V3_LED.P$1 136.14,1.52 133.86,3.81 133.1,3.81 132.08,4.83 132.08,6.6 132.84,7.37 135.8,7.37 R34.1
N$75
  Top 0.305: R39.1 53.94,26.25 56.13,28.45 58.51,28.45 SHORE_LED.P$1
N$76  (3 unrouted)
N$77  (2 unrouted)
N$78  (1 unrouted)
N$79  (1 unrouted)
N$80  (2 unrouted)
N$81  (2 unrouted)
N$82  (2 unrouted)
N$83  (1 unrouted)
N$84  (2 unrouted)
N$85  (2 unrouted)
N$86  (1 unrouted)
N$87  (3 unrouted)
N$88  (2 unrouted)
N$89  (2 unrouted)
N$90  (2 unrouted)
N$91  (2 unrouted)
N$92  (1 unrouted)
N$93  (1 unrouted)
N$94  (1 unrouted)
ON_SW  (3 unrouted)
RELAY-BATT  (5 unrouted)
RELAY-CTRL  (5 unrouted)
RELAY-SHORE  (2 unrouted)
  Top 0.305: SHORE-FET.3 57.16,25.66 55.37,23.88 52.32,23.88 52.32,24.93 R39.2
RELAY_OUT  (19 unrouted)
  Top 0.254: 5V_REG.13 5V_REG.14 75.14,60.53 73.54,60.53 73.46,60.45 73.41,60.45 73.03,60.07 5V_REG.4
SCL1  (10 unrouted)
SCL-3V3  (3 unrouted)
SDA1  (10 unrouted)
SDA-3V3  (3 unrouted)
SK  (4 unrouted)
SW-5V  (9 unrouted)
T1_CURR  (via drill 0.5)
  Top 0.305: v131.57,95 133.47,95 U$4.P$7
  Bottom 0.305: THRUSTER_CURR_ADC.1 108.95,84.32 119.13,94.49 131.06,94.49 v131.57,95
T1_PWM
  Bottom 0.305: U1.6 127.97,85.28 132.38,89.69 132.38,105.2 THRUST1.P$2
T2_CURR  (via drill 0.5)
  Top 0.305: v118.11,95.25 119.88,95.25 U$8.P$7
  Bottom 0.305: THRUSTER_CURR_ADC.2 108.3,85.44 v118.11,95.25
T2_PWM  (via drill 0.5)
  Top 0.305: v127.52,93.68 v127.52,95.76
  Bottom 0.305: U1.7 127.32,83.98 122.27,89.04 122.27,90.33 122.48,90.54 122.8,90.54 123.19,90.93 123.59,90.93 124.71,92.06 124.71,92.71 126.55,92.71 v127.52,93.68 | v127.52,95.76 127.52,98.54 123.19,102.87 THRUST2.P$2
T3_CURR  (via drill 0.5)
  Top 0.305: v104.14,95.25 105.91,95.25 U$11.P$7
  Bottom 0.305: THRUSTER_CURR_ADC.3 107.66,86.33 109.49,88.16 109.49,89.9 v104.14,95.25
T3_PWM  (via drill 0.5)
  Top 0.305: v124.21,93.47 v124.21,95.5
  Bottom 0.305: v124.21,93.47 124.21,92.27 123.38,91.44 121.41,91.44 120.14,90.17 118.62,90.17 124.14,84.65 125.88,84.65 126.53,84 126.53,83.43 U1.8 | THRUST3.P$2 112.86,105.71 113.62,105.71 114.09,105.24 114.09,103.9 122.48,95.5 v124.21,95.5
T4_CURR  (via drill 0.5)
  Top 0.305: v90.42,95.25 91.94,95.25 U$14.P$7
  Bottom 0.305: THRUSTER_CURR_ADC.4 106.98,83.08 106.98,83.7 106.68,84.01 101.66,84.01 v90.42,95.25
T4_PWM  (via drill 0.5)
  Top 0.305: v116.84,90.42 115.82,90.42 114.55,91.69 114.55,103.63 v113.28,104.9
  Bottom 0.305: U1.9 125.88,83.43 125.88,83.93 125.67,84.14 123.12,84.14 v116.84,90.42 | v113.28,104.9 98.04,104.9 95.25,107.7 THRUST4.P$2
T5_CURR  (via drill 0.5)
  Top 0.305: v137.92,76.71 136.4,76.71 U$17.P$7
  Bottom 0.305: THRUSTER_CURR_ADC.5 106.47,82.94 106.47,82.31 106.68,82.1 108.66,82.1 112.01,78.74 135.89,78.74 v137.92,76.71
T5_PWM
  Bottom 0.305: U1.10 125.38,80.75 126.87,79.25 136.53,79.25 138.73,77.04 138.73,76.37 133.35,70.99 THRUST5.P$2
T6_CURR  (via drill 0.5)
  Top 0.305: v124.13,76.38 122.76,76.38 U$23.P$7
  Bottom 0.305: THRUSTER_CURR_ADC.6 105.7,81.24 110.24,76.71 111.11,76.71 112.04,77.63 113.57,77.63 114.52,76.68 114.52,76.48 114.81,76.2 123.95,76.2 v124.13,76.38
T6_PWM  (via drill 0.5)
  Top 0.305: v124.71,80.26 127.76,80.26 128.02,80.01 v128.02,72.64
  Bottom 0.305: U1.11 124.72,80.28 v124.71,80.26 | v128.02,72.64 120.4,72.64 120.14,72.39 120.14,62.48 THRUST6.P$2
T7_CURR  (via drill 0.5)
  Top 0.305: v107.46,77.49 108.32,77.49 U$29.P$7
  Bottom 0.305: THRUSTER_CURR_ADC.7 105.05,79.89 v107.46,77.49
T7_PWM  (via drill 0.5)
  Top 0.305: v119.38,75.18 120.95,76.75 120.95,80.38 121.56,81 123.16,81 v123.44,81.28
  Bottom 0.305: U1.12 124.07,81.91 v123.44,81.28 | v119.38,75.18 119.38,74.93 106.68,62.23 THRUST7.P$2
T8_CURR  (via drill 0.5)
  Top 0.305: v97.59,76.26 97.48,76.26 96.77,76.96 U$39.P$7
  Bottom 0.305: THRUSTER_CURR_ADC.8 100.33,83.05 97.28,80.01 97.28,76.57 v97.59,76.26
T8_PWM  (via drill 0.5)
  Top 0.305: v119.38,80.01 119.38,80.52 117.86,82.04 102.11,82.04 v100.08,84.07
  Bottom 0.305: U1.13 123.28,83.14 123.28,82.64 123.07,82.43 121.8,82.43 v119.38,80.01 | v100.08,84.07 100.08,83.52 96.77,80.22 96.77,65.79 THRUST8.P$2
V_THRUST  (20 unrouted)
  Top 0.305: R30.1 86.65,70.65 87.12,71.12 87.12,73.66 87.63,74.17 87.63,75.95 U$39.P$1
  pour Top (isolate 0.305, no thermals): 86.36,92.2 141.6,92.2 141.6,79.5 85.09,79.5 85.09,92.2
  pour Top (isolate 0.305, no thermals): 96.52,95.38 99.69,95.38 99.69,90.93 96.52,90.93
  pour Top (isolate 0.305, no thermals): 110.49,95.38 113.66,95.38 113.66,90.93 110.49,90.93
  pour Top (isolate 0.305, no thermals): 124.46,95.38 127.63,95.38 127.63,90.93 124.46,90.93
  pour Top (isolate 0.305, no thermals): 137.8,95.38 140.97,95.38 140.97,90.93 137.8,90.93
  pour Top (isolate 0.305, no thermals): 128.91,80.77 132.08,80.77 132.08,76.33 128.91,76.33
  pour Top (isolate 0.305, no thermals): 114.93,80.77 118.11,80.77 118.11,76.33 114.93,76.33
  pour Top (isolate 0.305, no thermals): 101.6,81.41 104.77,81.41 104.77,76.96 101.6,76.96
  pour Top (isolate 0.305, no thermals): 88.27,80.77 91.44,80.77 91.44,76.33 88.27,76.33
VCC  (1 unrouted)
VDD  (10 unrouted)
WATER  (1 unrouted)
(copper drawn outside any net)
  shapes: Top area x1